# Altium PCB SEG_pressure gauge_up  V2.1.PcbDoc (part 5 of 5)
Units mm, origin at the board's own origin, x right, y up, seen from the top; angles counter-clockwise.
Board outline 67.74 x 67.74 mm, 2 copper layers (Top Layer, Bottom Layer); 36 components, 59 nets, 200 pads, 20 vias.
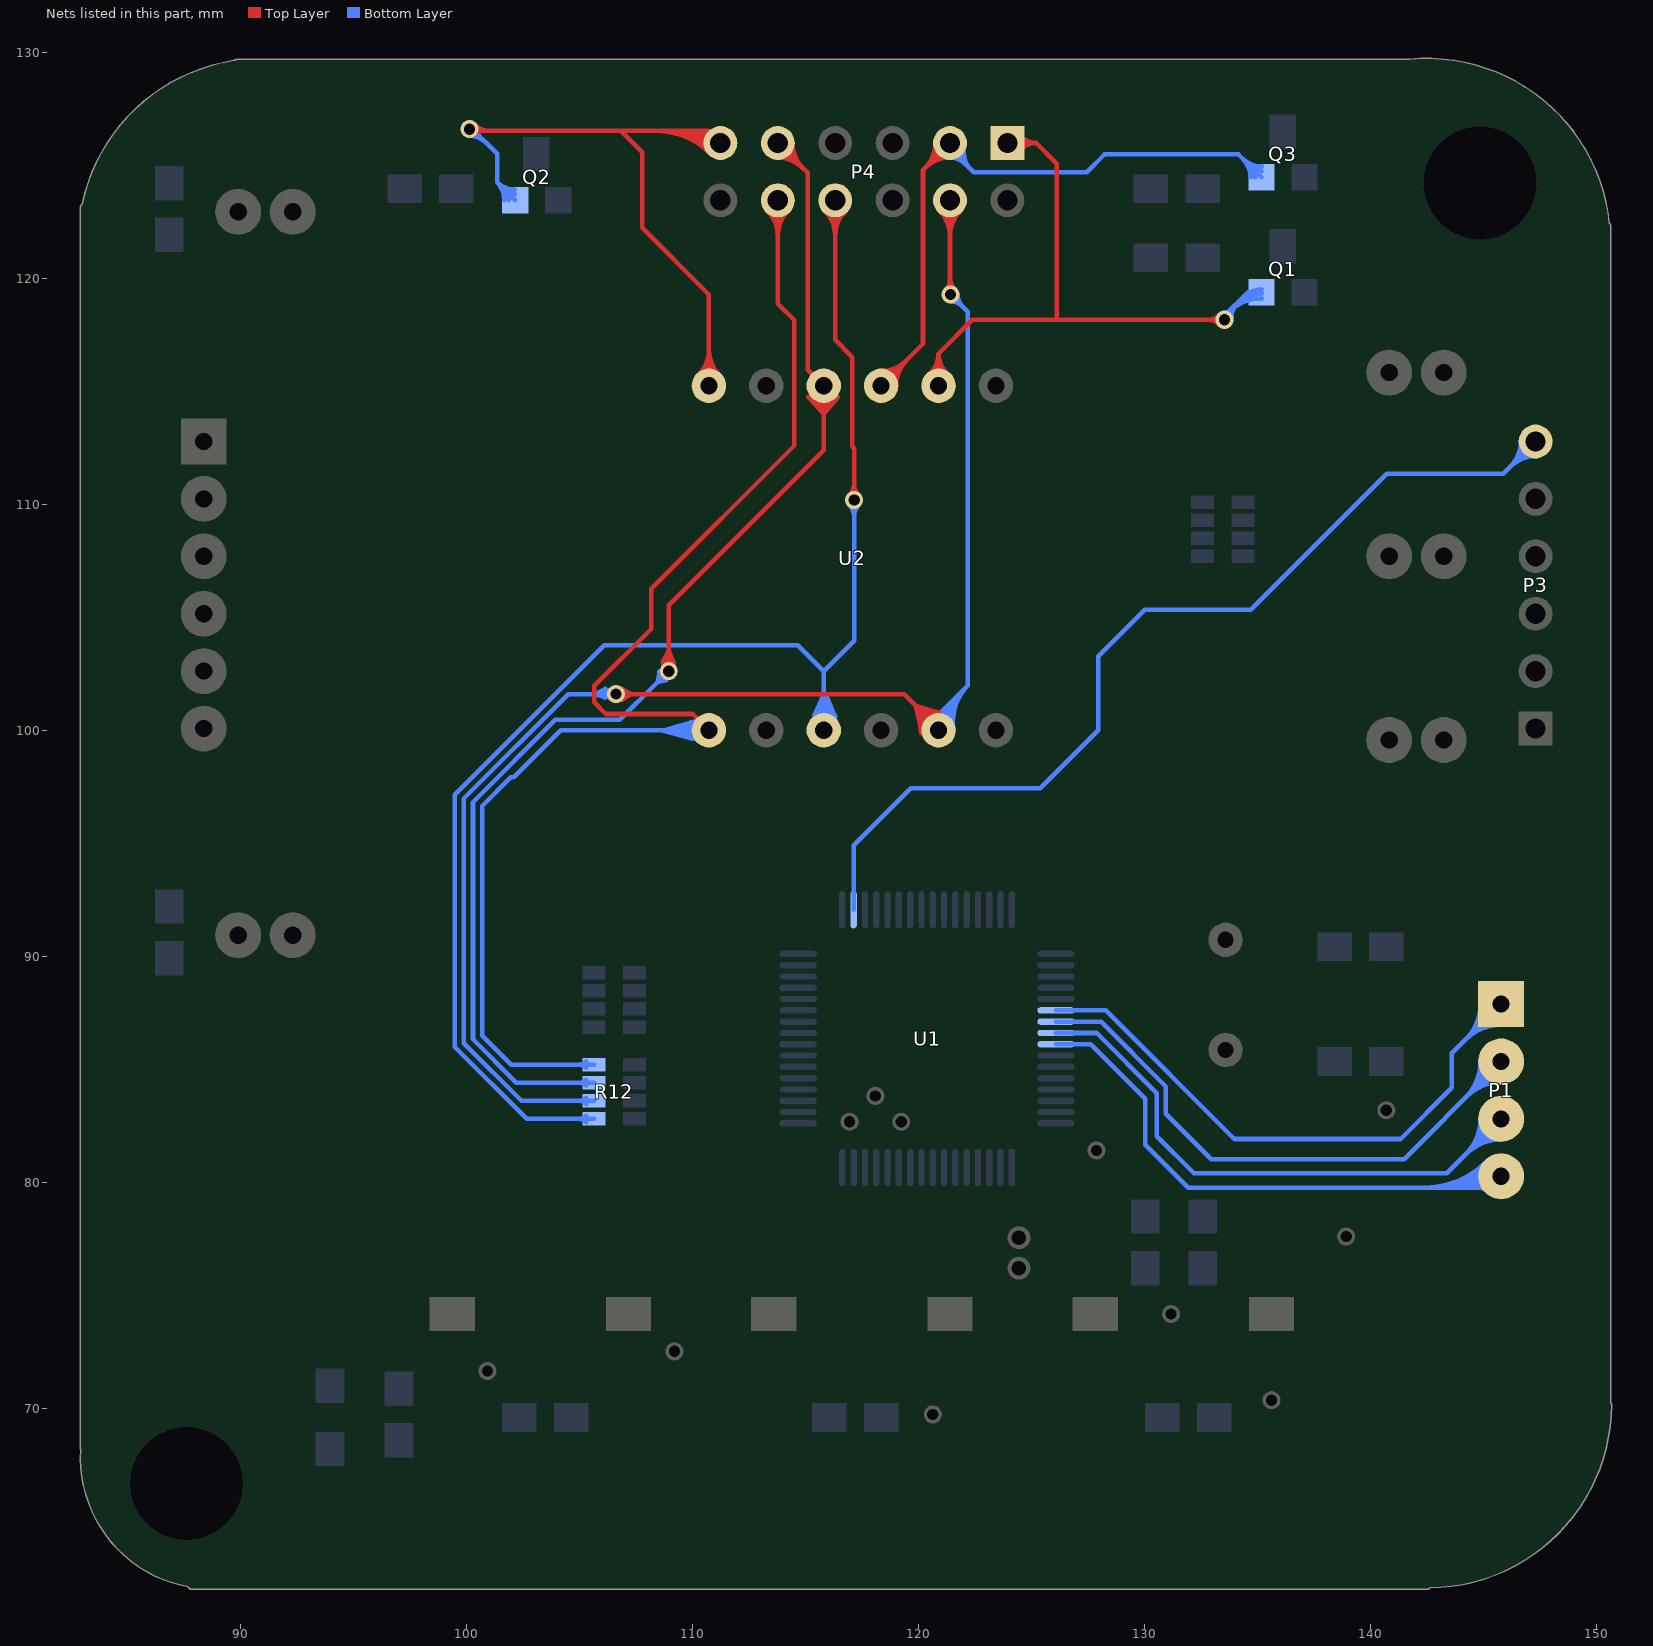
[diagram p5: the nets of this part, all layers, seen from the top]

## Via types
v1: diameter 0.8, hole 0.5, Top Layer to Bottom Layer, 20 vias

## Nets (pads, with @x,y where several pads share a name; then routed paths per layer and width w, separated by ;. In a path a pad name is that pad's centre, name@x,y a point inside that pad or via, vN(x,y) a via of type N, cw(c..) or ccw(c..) an arc to the next point about the centre after c; other vN are vias at no path point) (continued)
SEG5: P4.11 R12.7 U2.e | length 140.3
  Top Layer w0.203: U2.e@110.744,100 110.027,100.717 106.187,100.717 105.67,101.234 105.67,101.966 108.185,104.48 108.185,106.255 114.529,112.598 114.529,118.135 113.792,118.872 P4.11@113.792,123.444 ; 113.792,121.879 cw(c115.357,121.879) 114.25,122.986 ccw(c115.357,121.879) 113.792,121.879 ; 113.792,121.879 ccw(c112.227,121.879) 113.334,122.986 cw(c112.227,121.879) 113.792,121.879 ; 113.792,122.369 cw(c114.867,122.369) 114.107,123.129 ccw(c114.867,122.369) 113.792,122.369 ; 113.792,122.369 ccw(c112.717,122.369) 113.477,123.129 cw(c112.717,122.369) 113.792,122.369
  Bottom Layer w0.203: R12.7@105.316,85.064 ccw(c104.977,84.725) 104.977,85.204 ccw(c104.977,85.683) R12.7@105.316,85.344 ; R12.7@105.664,85.204 101.994,85.204 100.711,86.487 100.711,96.647 101.981,97.917 102.108,97.917 104.191,100 108.636,100 ; 110.058,99.644 110.058,99.619 110.007,99.619 108.636,100 ; 108.636,100 108.763,100 ; 108.636,100 109.982,99.797 108.763,100 ; 108.763,100 109.144,100 ; 108.763,100 110.058,100.381 U2.e@110.744,100 ; 108.936,100.051 cw(c109.361,98.604) U2.e@110.422,99.675 ; 108.936,100.051 cw(c109.361,98.604) U2.e@110.422,99.675 ; 108.936,100.051 cw(c109.361,98.604) U2.e@110.422,99.675 ; 108.936,100.051 cw(c109.361,98.604) U2.e@110.422,99.675 ; 108.936,100.051 cw(c109.361,98.604) U2.e@110.422,99.675 ; 109.144,100 U2.e@110.744,100 ; 109.144,100 109.957,100.279 109.88,100.152 110.007,100.254 U2.e@110.744,100 ; 109.15,100 cw(c109.15,98.406) U2.e@110.277,99.533 ; 109.15,100 ccw(c109.15,101.594) U2.e@110.277,100.467 ; 109.15,100 cw(c109.15,98.406) U2.e@110.277,99.533 ; 109.15,100 ccw(c109.15,101.594) U2.e@110.277,100.467 ; 109.15,100 cw(c109.15,98.406) U2.e@110.277,99.533 ; 109.15,100 ccw(c109.15,101.594) U2.e@110.277,100.467 ; 109.15,100 cw(c109.15,98.406) U2.e@110.277,99.533 ; 109.15,100 ccw(c109.15,101.594) U2.e@110.277,100.467 ; 109.15,100 ccw(c109.15,101.594) U2.e@110.277,100.467 ; 109.15,100 cw(c109.15,98.406) U2.e@110.277,99.533 ; 109.25,100.037 cw(c109.587,99.058) U2.e@110.389,99.711 ; 109.25,100.037 cw(c109.587,99.058) U2.e@110.389,99.711 ; 109.25,100.037 cw(c109.587,99.058) U2.e@110.389,99.711 ; 109.25,100.037 cw(c109.587,99.058) U2.e@110.389,99.711 ; 109.25,100.037 cw(c109.587,99.058) U2.e@110.389,99.711 ; 109.266,100.148 cw(c109.637,98.883) U2.e@110.565,99.82 ; 109.266,100.148 cw(c109.637,98.883) U2.e@110.565,99.82 ; 109.266,100.148 cw(c109.637,98.883) U2.e@110.565,99.82 ; 109.266,100.148 cw(c109.637,98.883) U2.e@110.565,99.82 ; 109.266,100.148 cw(c109.637,98.883) U2.e@110.565,99.82 ; 109.526,100.131 cw(c109.827,99.254) U2.e@110.547,99.84 ; 109.526,100.131 cw(c109.827,99.254) U2.e@110.547,99.84 ; 109.526,100.131 cw(c109.827,99.254) U2.e@110.547,99.84 ; 109.526,100.131 cw(c109.827,99.254) U2.e@110.547,99.84 ; 109.526,100.131 cw(c109.827,99.254) U2.e@110.547,99.84 ; 109.596,100.245 cw(c109.914,99.162) U2.e@110.708,99.964 ; 109.596,100.245 cw(c109.914,99.162) U2.e@110.708,99.964 ; 109.596,100.245 cw(c109.914,99.162) U2.e@110.708,99.964 ; 109.596,100.245 cw(c109.914,99.162) U2.e@110.708,99.964 ; 109.596,100.245 cw(c109.914,99.162) U2.e@110.708,99.964 ; 109.64,100 cw(c109.64,98.896) U2.e@110.421,99.677 ; 109.64,100 ccw(c109.64,101.104) U2.e@110.421,100.323 ; 109.64,100 cw(c109.64,98.896) U2.e@110.421,99.677 ; 109.64,100 ccw(c109.64,101.104) U2.e@110.421,100.323 ; 109.64,100 cw(c109.64,98.896) U2.e@110.421,99.677 ; 109.64,100 ccw(c109.64,101.104) U2.e@110.421,100.323 ; 109.64,100 cw(c109.64,98.896) U2.e@110.421,99.677 ; 109.64,100 ccw(c109.64,101.104) U2.e@110.421,100.323 ; 109.64,100 ccw(c109.64,101.104) U2.e@110.421,100.323 ; 109.64,100 cw(c109.64,98.896) U2.e@110.421,99.677 ; 109.801,100.226 cw(c110.068,99.45) U2.e@110.705,99.968 ; 109.801,100.226 cw(c110.068,99.45) U2.e@110.705,99.968 ; 109.801,100.226 cw(c110.068,99.45) U2.e@110.705,99.968 ; 109.801,100.226 cw(c110.068,99.45) U2.e@110.705,99.968 ; 109.801,100.226 cw(c110.068,99.45) U2.e@110.705,99.968 ; 109.926,100.342 cw(c110.191,99.442) U2.e@110.851,100.108 ; 109.926,100.342 cw(c110.191,99.442) U2.e@110.851,100.108 ; 109.926,100.342 cw(c110.191,99.442) U2.e@110.851,100.108 ; 109.926,100.342 cw(c110.191,99.442) U2.e@110.851,100.108 ; 109.926,100.342 cw(c110.191,99.442) U2.e@110.851,100.108
SEG6: P4.5 pad.14 R12.5 U2.f | length 93.4
  Top Layer w0.203: 109.195,102.946 108.966,103.505 ; P4.5@113.792,125.984 115.113,124.663 115.113,115.951 U2.f@115.824,115.24 ; 115.138,114.757 115.205,114.683 115.824,113.995 ; U2.f@115.418,114.63 115.65,114.268 ; 116.436,114.73 115.824,113.995 ; pad.14@108.755,102.827 ccw(c108.246,103.336) 108.966,103.336 ; pad.14@108.755,102.827 ccw(c108.246,103.336) 108.966,103.336 ; pad.14@108.755,102.827 ccw(c108.246,103.336) 108.966,103.336 ; pad.14@108.755,102.827 ccw(c108.246,103.336) 108.966,103.336 ; pad.14@108.755,102.827 ccw(c108.246,103.336) 108.966,103.336 ; 108.788,103.01 108.712,103.048 108.966,103.505 ; 108.788,103.01 108.814,102.997 108.966,103.099 ; 108.788,103.01 108.966,103.099 ; 108.788,103.01 108.773,103.002 108.712,102.972 pad.14@108.966,102.616 108.966,103.099 ; pad.14@108.898,102.683 ccw(c108.461,103.115) 109.03,103.348 ; pad.14@108.898,102.683 ccw(c108.461,103.115) 109.03,103.348 ; pad.14@108.898,102.683 ccw(c108.461,103.115) 109.03,103.348 ; pad.14@108.898,102.683 ccw(c108.461,103.115) 109.03,103.348 ; pad.14@108.898,102.683 ccw(c108.461,103.115) 109.03,103.348 ; 108.966,103.099 108.966,103.505 ; 108.966,103.336 ccw(c109.686,103.336) pad.14@109.177,102.827 ; 108.966,103.336 ccw(c109.686,103.336) pad.14@109.177,102.827 ; 108.966,103.336 ccw(c109.686,103.336) pad.14@109.177,102.827 ; 108.966,103.336 ccw(c109.686,103.336) pad.14@109.177,102.827 ; 108.966,103.336 ccw(c109.686,103.336) pad.14@109.177,102.827 ; 108.966,103.505 108.966,105.537 115.824,112.395 115.824,113.995 ; pad.14@109.043,102.54 ccw(c108.699,102.88) 109.147,103.063 ; pad.14@109.043,102.54 ccw(c108.699,102.88) 109.147,103.063 ; pad.14@109.043,102.54 ccw(c108.699,102.88) 109.147,103.063 ; pad.14@109.043,102.54 ccw(c108.699,102.88) 109.147,103.063 ; pad.14@109.043,102.54 ccw(c108.699,102.88) 109.147,103.063 ; P4.5@113.792,125.336 cw(c113.792,123.77) 114.899,124.877 ; P4.5@113.792,125.336 cw(c113.792,123.77) 114.899,124.877 ; P4.5@113.792,125.336 cw(c113.792,123.77) 114.899,124.877 ; P4.5@113.792,125.539 cw(c113.792,124.464) 114.552,125.224 ; P4.5@113.792,125.539 cw(c113.792,124.464) 114.552,125.224 ; P4.5@113.792,125.539 cw(c113.792,124.464) 114.552,125.224 ; P4.5@114.237,125.984 ccw(c115.312,125.984) 114.552,125.224 ; P4.5@114.237,125.984 ccw(c115.312,125.984) 114.552,125.224 ; P4.5@114.237,125.984 ccw(c115.312,125.984) 114.552,125.224 ; P4.5@114.44,125.984 ccw(c116.006,125.984) 114.899,124.877 ; P4.5@114.44,125.984 ccw(c116.006,125.984) 114.899,124.877 ; P4.5@114.44,125.984 ccw(c116.006,125.984) 114.899,124.877 ; U2.f@115.468,114.684 cw(c115.248,114.34) 115.65,114.268 ; U2.f@115.468,114.684 cw(c115.248,114.34) 115.65,114.268 ; U2.f@115.468,114.684 cw(c115.248,114.34) 115.65,114.268 ; U2.f@115.468,114.684 cw(c115.248,114.34) 115.65,114.268 ; U2.f@115.468,114.684 cw(c115.248,114.34) 115.65,114.268 ; 115.65,114.268 cw(c116.052,114.196) U2.f@115.965,114.595 ; 115.65,114.268 cw(c116.052,114.196) U2.f@115.965,114.595 ; 115.65,114.268 cw(c116.052,114.196) U2.f@115.965,114.595 ; 115.65,114.268 cw(c116.052,114.196) U2.f@115.965,114.595 ; 115.65,114.268 cw(c116.052,114.196) U2.f@115.965,114.595 ; 115.65,114.268 115.824,113.995 ; 115.65,114.268 115.646,114.249 115.824,113.995 ; 115.65,114.268 U2.f@115.824,115.24 ; 115.824,113.995 115.824,114.376 ; 115.824,113.995 116.18,114.554 116.17,114.549 115.824,114.376 ; 115.824,114.376 U2.f@115.824,115.24
  Bottom Layer w0.203: R12.5@105.316,84.264 ccw(c104.977,83.925) 104.977,84.404 ccw(c104.977,84.883) R12.5@105.316,84.544 ; R12.5@105.664,84.404 102.224,84.404 100.308,86.32 100.308,96.814 103.951,100.457 106.807,100.457 108.471,102.121 ; 108.56,102.616 108.471,102.121 ; 108.471,102.121 108.864,102.21 pad.14@108.966,102.616 108.471,102.121
SEG7: P4.8 pad.13 R12.3 U2.g | length 137.1
  Top Layer w0.203: pad.13@106.883,101.346 107.315,101.6 ; 120.548,100.762 120.447,100.718 ; 120.929,100.787 120.675,100.838 ; v1@121.412,119.253 121.412,119.278 P4.8@121.412,123.444 ; 107.315,101.6 pad.13@106.629,101.6 106.553,101.6 106.605,101.636 106.883,101.829 107.315,101.6 ; 107.315,101.6 119.38,101.6 119.888,101.092 ; 119.888,101.092 120.066,100.33 ; 119.888,101.092 120.574,100.838 120.371,100.838 120.447,100.718 ; 119.888,101.092 120.675,100.838 ; 119.888,101.092 120.319,100.661 ; 120.066,100.33 120.142,99.873 120.374,100.293 U2.g@120.486,100.494 ; 120.066,100.33 120.091,100.279 120.272,100.505 120.362,100.618 ; 120.286,100.647 120.142,100.584 119.99,100.762 120.286,100.647 ; 120.286,100.647 120.319,100.661 ; 120.286,100.647 120.362,100.618 ; 120.319,100.661 120.362,100.618 ; 120.319,100.661 120.447,100.718 ; 120.362,100.618 U2.g@120.486,100.494 ; 120.447,100.718 U2.g@120.534,100.582 ; U2.g@120.486,100.494 U2.g@120.534,100.582 ; U2.g@120.486,100.494 U2.g@120.771,100.209 ; U2.g@120.534,100.582 120.675,100.838 ; U2.g@120.534,100.582 U2.g@120.771,100.209 ; 120.675,100.838 U2.g@120.876,100.104 ; U2.g@120.771,100.209 U2.g@120.876,100.104 ; U2.g@120.771,100.209 U2.g@120.904,100 ; U2.g@120.876,100.104 120.904,100.076 U2.g@120.904,100 ; U2.g@120.876,100.104 U2.g@120.904,100 ; P4.8@120.954,122.986 cw(c119.847,121.879) 121.412,121.879 ; P4.8@120.954,122.986 cw(c119.847,121.879) 121.412,121.879 ; P4.8@120.954,122.986 cw(c119.847,121.879) 121.412,121.879 ; P4.8@121.097,123.129 cw(c120.337,122.369) 121.412,122.369 ; P4.8@121.097,123.129 cw(c120.337,122.369) 121.412,122.369 ; P4.8@121.097,123.129 cw(c120.337,122.369) 121.412,122.369 ; v1@121.226,119.489 ccw(c120.778,119.937) 121.412,119.937 ; v1@121.226,119.489 ccw(c120.778,119.937) 121.412,119.937 ; v1@121.226,119.489 ccw(c120.778,119.937) 121.412,119.937 ; 121.412,120.06 ccw(c122.219,120.06) v1@121.648,119.489 ; 121.412,120.06 ccw(c122.219,120.06) v1@121.648,119.489 ; 121.412,120.06 ccw(c122.219,120.06) v1@121.648,119.489 ; 121.412,121.879 cw(c122.977,121.879) P4.8@121.87,122.986 ; 121.412,121.879 cw(c122.977,121.879) P4.8@121.87,122.986 ; 121.412,121.879 cw(c122.977,121.879) P4.8@121.87,122.986 ; 121.412,122.369 cw(c122.487,122.369) P4.8@121.727,123.129 ; 121.412,122.369 cw(c122.487,122.369) P4.8@121.727,123.129 ; 121.412,122.369 cw(c122.487,122.369) P4.8@121.727,123.129
  Bottom Layer w0.203: R12.3@105.316,83.464 ccw(c104.977,83.125) 104.977,83.604 ccw(c104.977,84.083) R12.3@105.316,83.744 ; R12.3@105.664,83.604 102.454,83.604 99.905,86.153 99.905,96.981 104.524,101.6 105.715,101.6 ; 106.147,101.448 105.715,101.6 ; pad.13@106.418,101.389 ccw(c105.909,100.88) 105.909,101.6 ccw(c105.909,102.32) pad.13@106.418,101.811 ; pad.13@106.553,101.6 106.147,101.829 105.715,101.6 ; pad.13@106.617,101.409 106.528,101.498 106.426,101.6 105.715,101.6 ; U2.g@120.904,100 120.904,100.686 122.199,101.981 ; v1(121.437,119.278) 122.199,118.516 122.199,101.981 ; U2.g@120.753,99.98 cw(c121.743,100.112) 121.037,100.818 ; U2.g@120.753,99.98 cw(c121.743,100.112) 121.037,100.818 ; U2.g@120.753,99.98 cw(c121.743,100.112) 121.037,100.818 ; U2.g@120.753,99.98 cw(c121.743,100.112) 121.037,100.818 ; U2.g@120.753,99.98 cw(c121.743,100.112) 121.037,100.818 ; U2.g@120.954,100.007 cw(c122.256,100.181) 121.327,101.109 ; U2.g@120.954,100.007 cw(c122.256,100.181) 121.327,101.109 ; U2.g@120.954,100.007 cw(c122.256,100.181) 121.327,101.109 ; U2.g@120.954,100.007 cw(c122.256,100.181) 121.327,101.109 ; U2.g@120.954,100.007 cw(c122.256,100.181) 121.327,101.109 ; U2.g@121.156,100.034 cw(c122.769,100.249) 121.618,101.4 ; U2.g@121.156,100.034 cw(c122.769,100.249) 121.618,101.4 ; U2.g@121.156,100.034 cw(c122.769,100.249) 121.618,101.4 ; U2.g@121.156,100.034 cw(c122.769,100.249) 121.618,101.4 ; U2.g@121.156,100.034 cw(c122.769,100.249) 121.618,101.4 ; U2.g@121.357,100.061 cw(c123.281,100.318) 121.909,101.69 ; U2.g@121.357,100.061 cw(c123.281,100.318) 121.909,101.69 ; U2.g@121.357,100.061 cw(c123.281,100.318) 121.909,101.69 ; U2.g@121.357,100.061 cw(c123.281,100.318) 121.909,101.69 ; U2.g@121.357,100.061 cw(c123.281,100.318) 121.909,101.69 ; v1@121.437,118.98 cw(c121.437,118.26) 121.947,118.769 ; v1@121.437,118.98 cw(c121.437,118.26) 121.947,118.769 ; v1@121.437,118.98 cw(c121.437,118.26) 121.947,118.769 ; v1@121.437,118.98 cw(c121.437,118.26) 121.947,118.769 ; v1@121.437,118.98 cw(c121.437,118.26) 121.947,118.769 ; U2.g@121.559,100.087 cw(c123.794,100.386) 122.199,101.981 ; U2.g@121.559,100.087 cw(c123.794,100.386) 122.199,101.981 ; U2.g@121.559,100.087 cw(c123.794,100.386) 122.199,101.981 ; U2.g@121.559,100.087 cw(c123.794,100.386) 122.199,101.981 ; U2.g@121.559,100.087 cw(c123.794,100.386) 122.199,101.981 ; v1@121.736,119.278 ccw(c122.456,119.278) 121.947,118.769 ; v1@121.736,119.278 ccw(c122.456,119.278) 121.947,118.769 ; v1@121.736,119.278 ccw(c122.456,119.278) 121.947,118.769 ; v1@121.736,119.278 ccw(c122.456,119.278) 121.947,118.769 ; v1@121.736,119.278 ccw(c122.456,119.278) 121.947,118.769
SEG8: P4.10 R12.1 U2.dot | length 116.9
  Top Layer w0.203: P4.10@116.332,123.444 116.332,117.272 117.094,116.51 117.094,112.547 117.17,112.471 117.17,110.287 117.221,110.236 v1(117.17,110.185) ; P4.10@115.874,122.986 cw(c114.767,121.879) 116.332,121.879 ; P4.10@115.874,122.986 cw(c114.767,121.879) 116.332,121.879 ; P4.10@115.874,122.986 cw(c114.767,121.879) 116.332,121.879 ; P4.10@116.017,123.129 cw(c115.257,122.369) 116.332,122.369 ; P4.10@116.017,123.129 cw(c115.257,122.369) 116.332,122.369 ; P4.10@116.017,123.129 cw(c115.257,122.369) 116.332,122.369 ; 116.332,121.879 cw(c117.897,121.879) P4.10@116.79,122.986 ; 116.332,121.879 cw(c117.897,121.879) P4.10@116.79,122.986 ; 116.332,121.879 cw(c117.897,121.879) P4.10@116.79,122.986 ; 116.332,122.369 cw(c117.407,122.369) P4.10@116.647,123.129 ; 116.332,122.369 cw(c117.407,122.369) P4.10@116.647,123.129 ; 116.332,122.369 cw(c117.407,122.369) P4.10@116.647,123.129 ; v1@116.959,110.396 ccw(c116.45,110.906) 117.17,110.906 ; v1@116.959,110.396 ccw(c116.45,110.906) 117.17,110.906 ; v1@116.959,110.396 ccw(c116.45,110.906) 117.17,110.906 ; 117.17,110.906 ccw(c117.891,110.906) v1@117.381,110.396 ; 117.17,110.906 ccw(c117.891,110.906) v1@117.381,110.396 ; 117.17,110.906 ccw(c117.891,110.906) v1@117.381,110.396
  Bottom Layer w0.203: R12.1@105.316,82.664 ccw(c104.977,82.325) 104.977,82.804 ccw(c104.977,83.283) R12.1@105.316,82.944 ; R12.1@105.664,82.804 102.683,82.804 99.501,85.986 99.501,97.148 106.112,103.759 114.681,103.759 115.824,102.616 ; 115.57,100.813 115.418,100.66 115.824,101.549 ; U2.dot@115.824,100 115.824,101.244 ; v1(117.17,110.185) 117.17,103.962 115.824,102.616 ; U2.dot@115.454,100.547 ccw(c114.982,101.244) 115.824,101.244 ; U2.dot@115.454,100.547 ccw(c114.982,101.244) 115.824,101.244 ; U2.dot@115.454,100.547 ccw(c114.982,101.244) 115.824,101.244 ; U2.dot@115.454,100.547 ccw(c114.982,101.244) 115.824,101.244 ; U2.dot@115.454,100.547 ccw(c114.982,101.244) 115.824,101.244 ; U2.dot@115.568,100.379 ccw(c115.241,100.861) 115.824,100.861 ; U2.dot@115.568,100.379 ccw(c115.241,100.861) 115.824,100.861 ; U2.dot@115.568,100.379 ccw(c115.241,100.861) 115.824,100.861 ; U2.dot@115.568,100.379 ccw(c115.241,100.861) 115.824,100.861 ; U2.dot@115.568,100.379 ccw(c115.241,100.861) 115.824,100.861 ; U2.dot@115.58,100.386 ccw(c115.222,100.951) 115.838,101.211 ; U2.dot@115.58,100.386 ccw(c115.222,100.951) 115.838,101.211 ; U2.dot@115.58,100.386 ccw(c115.222,100.951) 115.838,101.211 ; U2.dot@115.58,100.386 ccw(c115.222,100.951) 115.838,101.211 ; U2.dot@115.58,100.386 ccw(c115.222,100.951) 115.838,101.211 ; U2.dot@115.688,100.215 ccw(c115.352,100.746) 115.931,100.989 ; U2.dot@115.688,100.215 ccw(c115.352,100.746) 115.931,100.989 ; U2.dot@115.688,100.215 ccw(c115.352,100.746) 115.931,100.989 ; U2.dot@115.688,100.215 ccw(c115.352,100.746) 115.931,100.989 ; U2.dot@115.688,100.215 ccw(c115.352,100.746) 115.931,100.989 ; U2.dot@115.797,100.043 ccw(c115.482,100.54) 116.024,100.768 ; U2.dot@115.797,100.043 ccw(c115.482,100.54) 116.024,100.768 ; U2.dot@115.797,100.043 ccw(c115.482,100.54) 116.024,100.768 ; U2.dot@115.797,100.043 ccw(c115.482,100.54) 116.024,100.768 ; U2.dot@115.797,100.043 ccw(c115.482,100.54) 116.024,100.768 ; 115.824,100.861 ccw(c116.407,100.861) U2.dot@116.08,100.379 ; 115.824,100.861 ccw(c116.407,100.861) U2.dot@116.08,100.379 ; 115.824,100.861 ccw(c116.407,100.861) U2.dot@116.08,100.379 ; 115.824,100.861 ccw(c116.407,100.861) U2.dot@116.08,100.379 ; 115.824,100.861 ccw(c116.407,100.861) U2.dot@116.08,100.379 ; 115.824,101.244 ccw(c116.666,101.244) U2.dot@116.194,100.547 ; 115.824,101.244 ccw(c116.666,101.244) U2.dot@116.194,100.547 ; 115.824,101.244 ccw(c116.666,101.244) U2.dot@116.194,100.547 ; 115.824,101.244 ccw(c116.666,101.244) U2.dot@116.194,100.547 ; 115.824,101.244 ccw(c116.666,101.244) U2.dot@116.194,100.547 ; 115.824,101.244 115.824,101.295 ; 115.824,101.244 115.697,100.762 115.824,101.371 ; 115.824,101.244 116.027,100.762 116.207,100.657 116.332,100.584 116.21,100.872 ; 115.824,101.295 115.824,101.371 ; 115.824,101.295 116.21,100.872 ; 115.824,101.371 115.824,101.549 ; 115.824,101.549 115.824,101.6 ; 115.824,101.6 115.824,102.616 ; 115.824,101.6 115.976,101.422 116.21,100.872 ; v1@116.959,109.974 cw(c116.45,109.465) 117.17,109.465 ; v1@116.959,109.974 cw(c116.45,109.465) 117.17,109.465 ; v1@116.959,109.974 cw(c116.45,109.465) 117.17,109.465 ; v1@116.959,109.974 cw(c116.45,109.465) 117.17,109.465 ; v1@116.959,109.974 cw(c116.45,109.465) 117.17,109.465 ; 117.17,109.465 cw(c117.891,109.465) v1@117.381,109.974 ; 117.17,109.465 cw(c117.891,109.465) v1@117.381,109.974 ; 117.17,109.465 cw(c117.891,109.465) v1@117.381,109.974 ; 117.17,109.465 cw(c117.891,109.465) v1@117.381,109.974 ; 117.17,109.465 cw(c117.891,109.465) v1@117.381,109.974
SEG9: P4.6 Q2.2 U2.1 | length 117.3
  Top Layer w0.203: v1(100.152,126.594) 100.228,126.517 106.851,126.517 ; U2.1@110.744,115.24 110.744,119.278 107.798,122.225 107.798,125.571 106.851,126.517 ; P4.6@111.252,125.984 110.719,126.517 106.851,126.517 ; v1@100.22,126.661 ccw(c100.566,127.007) 100.566,126.517 ; v1@100.22,126.661 ccw(c100.566,127.007) 100.566,126.517 ; v1@100.22,126.661 ccw(c100.566,127.007) 100.566,126.517 ; v1@100.22,126.661 ccw(c100.566,127.007) 100.566,126.517 ; v1@100.22,126.661 ccw(c100.566,127.007) 100.566,126.517 ; v1@100.363,126.383 cw(c100.689,126.057) 100.689,126.517 ; v1@100.363,126.383 cw(c100.689,126.057) 100.689,126.517 ; v1@100.363,126.383 cw(c100.689,126.057) 100.689,126.517 ; v1@100.363,126.383 cw(c100.689,126.057) 100.689,126.517 ; v1@100.363,126.383 cw(c100.689,126.057) 100.689,126.517 ; v1@100.363,126.805 ccw(c101.057,127.498) 101.057,126.517 ; v1@100.363,126.805 ccw(c101.057,127.498) 101.057,126.517 ; v1@100.363,126.805 ccw(c101.057,127.498) 101.057,126.517 ; v1@100.363,126.805 ccw(c101.057,127.498) 101.057,126.517 ; v1@100.363,126.805 ccw(c101.057,127.498) 101.057,126.517 ; 108.399,126.517 cw(c108.399,123.131) P4.6@110.794,125.526 ; 108.399,126.517 cw(c108.399,123.131) P4.6@110.794,125.526 ; 108.399,126.517 cw(c108.399,123.131) P4.6@110.794,125.526 ; 108.399,126.517 cw(c108.399,123.131) P4.6@110.794,125.526 ; 108.399,126.517 cw(c108.399,123.131) P4.6@110.794,125.526 ; 108.889,126.517 cw(c108.889,123.621) P4.6@110.937,125.669 ; 108.889,126.517 cw(c108.889,123.621) P4.6@110.937,125.669 ; 108.889,126.517 cw(c108.889,123.621) P4.6@110.937,125.669 ; 108.889,126.517 cw(c108.889,123.621) P4.6@110.937,125.669 ; 108.889,126.517 cw(c108.889,123.621) P4.6@110.937,125.669 ; 109.38,126.517 cw(c109.38,124.112) P4.6@111.081,125.813 ; 109.38,126.517 cw(c109.38,124.112) P4.6@111.081,125.813 ; 109.38,126.517 cw(c109.38,124.112) P4.6@111.081,125.813 ; 109.38,126.517 cw(c109.38,124.112) P4.6@111.081,125.813 ; 109.38,126.517 cw(c109.38,124.112) P4.6@111.081,125.813 ; 109.871,126.517 cw(c109.871,124.603) P4.6@111.225,125.957 ; 109.871,126.517 cw(c109.871,124.603) P4.6@111.225,125.957 ; 109.871,126.517 cw(c109.871,124.603) P4.6@111.225,125.957 ; 109.871,126.517 cw(c109.871,124.603) P4.6@111.225,125.957 ; 109.871,126.517 cw(c109.871,124.603) P4.6@111.225,125.957 ; U2.1@110.277,115.707 ccw(c109.15,116.834) 110.744,116.834 ; U2.1@110.277,115.707 ccw(c109.15,116.834) 110.744,116.834 ; U2.1@110.277,115.707 ccw(c109.15,116.834) 110.744,116.834 ; U2.1@110.277,115.707 ccw(c109.15,116.834) 110.744,116.834 ; U2.1@110.277,115.707 ccw(c109.15,116.834) 110.744,116.834 ; 110.361,126.517 cw(c110.361,125.093) P4.6@111.368,126.1 ; 110.361,126.517 cw(c110.361,125.093) P4.6@111.368,126.1 ; 110.361,126.517 cw(c110.361,125.093) P4.6@111.368,126.1 ; 110.361,126.517 cw(c110.361,125.093) P4.6@111.368,126.1 ; 110.361,126.517 cw(c110.361,125.093) P4.6@111.368,126.1 ; U2.1@110.421,115.563 ccw(c109.64,116.344) 110.744,116.344 ; U2.1@110.421,115.563 ccw(c109.64,116.344) 110.744,116.344 ; U2.1@110.421,115.563 ccw(c109.64,116.344) 110.744,116.344 ; U2.1@110.421,115.563 ccw(c109.64,116.344) 110.744,116.344 ; U2.1@110.421,115.563 ccw(c109.64,116.344) 110.744,116.344 ; 110.744,116.344 ccw(c111.848,116.344) U2.1@111.067,115.563 ; 110.744,116.344 ccw(c111.848,116.344) U2.1@111.067,115.563 ; 110.744,116.344 ccw(c111.848,116.344) U2.1@111.067,115.563 ; 110.744,116.344 ccw(c111.848,116.344) U2.1@111.067,115.563 ; 110.744,116.344 ccw(c111.848,116.344) U2.1@111.067,115.563 ; 110.744,116.834 ccw(c112.338,116.834) U2.1@111.211,115.707 ; 110.744,116.834 ccw(c112.338,116.834) U2.1@111.211,115.707 ; 110.744,116.834 ccw(c112.338,116.834) U2.1@111.211,115.707 ; 110.744,116.834 ccw(c112.338,116.834) U2.1@111.211,115.707 ; 110.744,116.834 ccw(c112.338,116.834) U2.1@111.211,115.707
  Bottom Layer w0.203: v1(100.152,126.594) 100.279,126.594 101.371,125.501 101.371,124.244 ; Q2.2@102.171,123.444 101.371,124.244 ; v1@100.152,126.295 cw(c100.152,125.268) 100.878,125.994 ; v1@100.152,126.295 cw(c100.152,125.268) 100.878,125.994 ; v1@100.152,126.295 cw(c100.152,125.268) 100.878,125.994 ; v1@100.152,126.498 cw(c100.152,125.962) 100.532,126.341 ; v1@100.152,126.498 cw(c100.152,125.962) 100.532,126.341 ; v1@100.152,126.498 cw(c100.152,125.962) 100.532,126.341 ; v1@100.451,126.594 ccw(c100.864,126.594) 100.572,126.301 ; v1@100.451,126.594 ccw(c100.864,126.594) 100.572,126.301 ; v1@100.451,126.594 ccw(c100.864,126.594) 100.572,126.301 ; 101.371,124.244 cw(c100.604,123.477) Q2.2@101.689,123.454 ; 101.371,124.244 ccw(c102.139,125.011) Q2.2@102.161,123.926 ; 101.371,124.244 cw(c100.604,123.477) Q2.2@101.689,123.454 ; 101.371,124.244 ccw(c102.139,125.011) Q2.2@102.161,123.926 ; 101.371,124.244 ccw(c102.139,125.011) Q2.2@102.161,123.926 ; 101.371,124.244 cw(c100.604,123.477) Q2.2@101.689,123.454 ; Q2.2@101.708,123.907 cw(c101.264,123.463) Q2.2@101.892,123.45 ; Q2.2@101.708,123.907 ccw(c102.152,124.351) Q2.2@102.166,123.723 ; Q2.2@101.708,123.907 cw(c101.264,123.463) Q2.2@101.892,123.45 ; Q2.2@101.708,123.907 ccw(c102.152,124.351) Q2.2@102.166,123.723 ; Q2.2@101.708,123.907 ccw(c102.152,124.351) Q2.2@102.166,123.723 ; Q2.2@101.708,123.907 cw(c101.264,123.463) Q2.2@101.892,123.45
SEG10: P4.2 Q3.2 U2.2 | length 83.7
  Top Layer w0.203: U2.2@118.364,115.24 120.218,117.094 120.218,124.79 P4.2@121.412,125.984 ; U2.2@118.364,115.697 ccw(c118.364,116.801) 119.144,116.02 ; U2.2@118.364,115.697 ccw(c118.364,116.801) 119.144,116.02 ; U2.2@118.364,115.697 ccw(c118.364,116.801) 119.144,116.02 ; U2.2@118.364,115.9 ccw(c118.364,117.495) 119.491,116.367 ; U2.2@118.364,115.9 ccw(c118.364,117.495) 119.491,116.367 ; U2.2@118.364,115.9 ccw(c118.364,117.495) 119.491,116.367 ; U2.2@118.821,115.24 cw(c119.925,115.24) 119.144,116.02 ; U2.2@118.821,115.24 cw(c119.925,115.24) 119.144,116.02 ; U2.2@118.821,115.24 cw(c119.925,115.24) 119.144,116.02 ; U2.2@119.024,115.24 cw(c120.619,115.24) 119.491,116.367 ; U2.2@119.024,115.24 cw(c120.619,115.24) 119.491,116.367 ; U2.2@119.024,115.24 cw(c120.619,115.24) 119.491,116.367 ; 120.305,124.877 cw(c121.412,123.77) P4.2@121.412,125.336 ; 120.305,124.877 ccw(c119.198,125.984) P4.2@120.764,125.984 ; 120.305,124.877 cw(c121.412,123.77) P4.2@121.412,125.336 ; 120.305,124.877 ccw(c119.198,125.984) P4.2@120.764,125.984 ; 120.305,124.877 ccw(c119.198,125.984) P4.2@120.764,125.984 ; 120.305,124.877 cw(c121.412,123.77) P4.2@121.412,125.336 ; 120.652,125.224 cw(c121.412,124.464) P4.2@121.412,125.539 ; 120.652,125.224 ccw(c119.892,125.984) P4.2@120.967,125.984 ; 120.652,125.224 cw(c121.412,124.464) P4.2@121.412,125.539 ; 120.652,125.224 ccw(c119.892,125.984) P4.2@120.967,125.984 ; 120.652,125.224 ccw(c119.892,125.984) P4.2@120.967,125.984 ; 120.652,125.224 cw(c121.412,124.464) P4.2@121.412,125.539
  Bottom Layer w0.203: P4.2@121.412,125.984 121.412,125.73 122.453,124.689 127.457,124.689 128.245,125.476 134.175,125.476 Q3.2@135.191,124.46 ; P4.2@121.412,125.336 cw(c121.412,124.383) 122.085,125.057 ; P4.2@121.412,125.336 cw(c121.412,124.383) 122.085,125.057 ; P4.2@121.412,125.336 cw(c121.412,124.383) 122.085,125.057 ; P4.2@121.412,125.336 cw(c121.412,124.383) 122.085,125.057 ; P4.2@121.412,125.336 cw(c121.412,124.383) 122.085,125.057 ; P4.2@121.647,125.927 ccw(c122.265,125.776) 121.815,125.327 ; P4.2@121.647,125.927 ccw(c122.265,125.776) 121.815,125.327 ; P4.2@121.647,125.927 ccw(c122.265,125.776) 121.815,125.327 ; P4.2@121.647,125.927 ccw(c122.265,125.776) 121.815,125.327 ; P4.2@121.647,125.927 ccw(c122.265,125.776) 121.815,125.327 ; P4.2@121.845,125.879 ccw(c122.676,125.676) 122.071,125.071 ; P4.2@121.845,125.879 ccw(c122.676,125.676) 122.071,125.071 ; P4.2@121.845,125.879 ccw(c122.676,125.676) 122.071,125.071 ; P4.2@121.845,125.879 ccw(c122.676,125.676) 122.071,125.071 ; P4.2@121.845,125.879 ccw(c122.676,125.676) 122.071,125.071 ; P4.2@122.042,125.831 ccw(c123.087,125.576) 122.326,124.816 ; P4.2@122.042,125.831 ccw(c123.087,125.576) 122.326,124.816 ; P4.2@122.042,125.831 ccw(c123.087,125.576) 122.326,124.816 ; P4.2@122.042,125.831 ccw(c123.087,125.576) 122.326,124.816 ; P4.2@122.042,125.831 ccw(c123.087,125.576) 122.326,124.816 ; 134.368,125.284 cw(c133.544,124.46) Q3.2@134.709,124.46 ; 134.368,125.284 ccw(c135.191,126.108) Q3.2@135.191,124.943 ; 134.368,125.284 cw(c133.544,124.46) Q3.2@134.709,124.46 ; 134.368,125.284 ccw(c135.191,126.108) Q3.2@135.191,124.943 ; 134.368,125.284 cw(c133.544,124.46) Q3.2@134.709,124.46 ; 134.368,125.284 ccw(c135.191,126.108) Q3.2@135.191,124.943 ; 134.368,125.284 cw(c133.544,124.46) Q3.2@134.709,124.46 ; 134.368,125.284 ccw(c135.191,126.108) Q3.2@135.191,124.943 ; 134.368,125.284 ccw(c135.191,126.108) Q3.2@135.191,124.943 ; 134.368,125.284 cw(c133.544,124.46) Q3.2@134.709,124.46 ; Q3.2@134.715,124.937 cw(c134.238,124.46) Q3.2@134.912,124.46 ; Q3.2@134.715,124.937 ccw(c135.191,125.414) Q3.2@135.191,124.739 ; Q3.2@134.715,124.937 cw(c134.238,124.46) Q3.2@134.912,124.46 ; Q3.2@134.715,124.937 ccw(c135.191,125.414) Q3.2@135.191,124.739 ; Q3.2@134.715,124.937 cw(c134.238,124.46) Q3.2@134.912,124.46 ; Q3.2@134.715,124.937 ccw(c135.191,125.414) Q3.2@135.191,124.739 ; Q3.2@134.715,124.937 cw(c134.238,124.46) Q3.2@134.912,124.46 ; Q3.2@134.715,124.937 ccw(c135.191,125.414) Q3.2@135.191,124.739 ; Q3.2@134.715,124.937 ccw(c135.191,125.414) Q3.2@135.191,124.739 ; Q3.2@134.715,124.937 cw(c134.238,124.46) Q3.2@134.912,124.46
SEG11: P4.1 Q1.2 U2.3 | length 76.5
  Top Layer w0.203: U2.3@120.904,115.24 120.904,116.662 ; P4.1@123.952,125.984 125.222,125.984 ; 126.136,118.186 126.136,125.07 125.222,125.984 ; v1(133.553,118.161) 122.403,118.161 120.904,116.662 ; U2.3@120.478,115.745 ccw(c119.703,116.662) 120.904,116.662 ; U2.3@120.478,115.745 ccw(c119.703,116.662) 120.904,116.662 ; U2.3@120.478,115.745 ccw(c119.703,116.662) 120.904,116.662 ; U2.3@120.609,115.589 ccw(c120.073,116.225) 120.904,116.225 ; U2.3@120.609,115.589 ccw(c120.073,116.225) 120.904,116.225 ; U2.3@120.609,115.589 ccw(c120.073,116.225) 120.904,116.225 ; 120.904,116.225 ccw(c121.735,116.225) U2.3@121.199,115.589 ; 120.904,116.225 ccw(c121.735,116.225) U2.3@121.199,115.589 ; 120.904,116.225 ccw(c121.735,116.225) U2.3@121.199,115.589 ; 120.904,116.662 ccw(c122.105,116.662) U2.3@121.33,115.745 ; 120.904,116.662 ccw(c122.105,116.662) U2.3@121.33,115.745 ; 120.904,116.662 ccw(c122.105,116.662) U2.3@121.33,115.745 ; P4.1@124.313,125.723 cw(c124.824,125.353) 124.824,125.984 ; P4.1@124.313,125.723 cw(c124.824,125.353) 124.824,125.984 ; P4.1@124.313,125.723 cw(c124.824,125.353) 124.824,125.984 ; P4.1@124.313,126.245 ccw(c124.824,126.615) 124.824,125.984 ; P4.1@124.313,126.245 ccw(c124.824,126.615) 124.824,125.984 ; P4.1@124.313,126.245 ccw(c124.824,126.615) 124.824,125.984 ; P4.1@124.477,125.604 cw(c125.222,125.065) 125.222,125.984 ; P4.1@124.477,125.604 cw(c125.222,125.065) 125.222,125.984 ; P4.1@124.477,125.604 cw(c125.222,125.065) 125.222,125.984 ; P4.1@124.477,126.364 ccw(c125.222,126.903) 125.222,125.984 ; P4.1@124.477,126.364 ccw(c125.222,126.903) 125.222,125.984 ; P4.1@124.477,126.364 ccw(c125.222,126.903) 125.222,125.984 ; 132.833,118.161 cw(c132.833,117.44) v1@133.342,117.95 ; 132.833,118.161 ccw(c132.833,118.881) v1@133.342,118.372 ; 132.833,118.161 cw(c132.833,117.44) v1@133.342,117.95 ; 132.833,118.161 ccw(c132.833,118.881) v1@133.342,118.372 ; 132.833,118.161 ccw(c132.833,118.881) v1@133.342,118.372 ; 132.833,118.161 cw(c132.833,117.44) v1@133.342,117.95
  Bottom Layer w0.203: v1@133.452,118.237 133.464,118.25 134.595,119.38 Q1.2@135.191,119.38 ; v1@133.553,118.459 ccw(c133.553,118.75) 133.759,118.544 ; v1@133.553,118.459 ccw(c133.553,118.75) 133.759,118.544 ; v1@133.553,118.459 ccw(c133.553,118.75) 133.759,118.544 ; v1@133.553,118.459 ccw(c133.553,118.75) 133.759,118.544 ; v1@133.553,118.459 ccw(c133.553,118.75) 133.759,118.544 ; v1@133.648,118.161 cw(c134.307,118.161) 133.841,118.627 ; v1@133.648,118.161 cw(c134.307,118.161) 133.841,118.627 ; v1@133.648,118.161 cw(c134.307,118.161) 133.841,118.627 ; v1@133.648,118.161 cw(c134.307,118.161) 133.841,118.627 ; v1@133.648,118.161 cw(c134.307,118.161) 133.841,118.627 ; v1@133.696,118.481 cw(c135.191,116.985) Q1.2@135.191,119.101 ; v1@133.696,118.481 cw(c135.191,116.985) Q1.2@135.191,119.101 ; v1@133.696,118.481 cw(c135.191,116.985) Q1.2@135.191,119.101 ; v1@133.696,118.481 cw(c135.191,116.985) Q1.2@135.191,119.101 ; v1@133.696,118.481 cw(c135.191,116.985) Q1.2@135.191,119.101 ; v1@133.852,118.161 cw(c135.001,118.161) 134.188,118.974 ; v1@133.852,118.161 cw(c135.001,118.161) 134.188,118.974 ; v1@133.852,118.161 cw(c135.001,118.161) 134.188,118.974 ; v1@133.852,118.161 cw(c135.001,118.161) 134.188,118.974 ; v1@133.852,118.161 cw(c135.001,118.161) 134.188,118.974 ; 134.042,118.828 cw(c135.191,117.679) Q1.2@135.191,119.304 ; 134.042,118.828 cw(c135.191,117.679) Q1.2@135.191,119.304 ; 134.042,118.828 cw(c135.191,117.679) Q1.2@135.191,119.304 ; 134.042,118.828 cw(c135.191,117.679) Q1.2@135.191,119.304 ; 134.042,118.828 cw(c135.191,117.679) Q1.2@135.191,119.304 ; 134.389,119.175 cw(c135.191,118.373) Q1.2@135.191,119.507 ; 134.389,119.175 cw(c135.191,118.373) Q1.2@135.191,119.507 ; 134.389,119.175 cw(c135.191,118.373) Q1.2@135.191,119.507 ; 134.389,119.175 cw(c135.191,118.373) Q1.2@135.191,119.507 ; 134.389,119.175 cw(c135.191,118.373) Q1.2@135.191,119.507
TCK: P1.4 U1.57 | length 36.2
  Bottom Layer w0.203: U1.57@126.099,86.106 127.635,86.106 130.048,83.693 130.048,81.661 131.953,79.756 P1.4@145.288,79.756 ; 142.362,79.756 ccw(c142.362,83.698) P1.4@145.149,80.911 ; 142.853,79.756 ccw(c142.853,83.207) P1.4@145.293,80.767 ; 143.343,79.756 ccw(c143.343,82.717) P1.4@145.437,80.623 ; 143.834,79.756 ccw(c143.834,82.226) P1.4@145.58,80.48 ; 144.324,79.756 ccw(c144.324,81.736) P1.4@145.724,80.336 ; P1.4@145.149,79.617 ccw(c144.815,79.283) 144.815,79.756 ccw(c144.815,81.245) P1.4@145.868,80.192
TDI: P1.2 U1.55 | length 65.2
  Bottom Layer w0.203: U1.55@126.099,87.106 128.095,87.106 130.962,84.238 130.962,83.033 132.969,81.026 141.503,81.026 145.161,84.684 145.161,84.709 P1.2@145.796,85.344 ; 144.217,83.74 ccw(c142.613,85.344) P1.2@144.882,85.344 ; 144.217,83.74 ccw(c142.613,85.344) P1.2@144.882,85.344 ; 144.217,83.74 ccw(c142.613,85.344) P1.2@144.882,85.344 ; 144.217,83.74 ccw(c142.613,85.344) P1.2@144.882,85.344 ; 144.217,83.74 ccw(c142.613,85.344) P1.2@144.882,85.344 ; 144.278,83.801 cw(c145.796,82.283) P1.2@145.796,84.43 ; 144.278,83.801 cw(c145.796,82.283) P1.2@145.796,84.43 ; 144.278,83.801 cw(c145.796,82.283) P1.2@145.796,84.43 ; 144.278,83.801 cw(c145.796,82.283) P1.2@145.796,84.43 ; 144.278,83.801 cw(c145.796,82.283) P1.2@145.796,84.43 ; 144.564,84.087 ccw(c143.306,85.344) P1.2@145.085,85.344 ; 144.564,84.087 ccw(c143.306,85.344) P1.2@145.085,85.344 ; 144.564,84.087 ccw(c143.306,85.344) P1.2@145.085,85.344 ; 144.564,84.087 ccw(c143.306,85.344) P1.2@145.085,85.344 ; 144.564,84.087 ccw(c143.306,85.344) P1.2@145.085,85.344 ; 144.625,84.148 cw(c145.796,82.977) P1.2@145.796,84.633 ; 144.625,84.148 cw(c145.796,82.977) P1.2@145.796,84.633 ; 144.625,84.148 cw(c145.796,82.977) P1.2@145.796,84.633 ; 144.625,84.148 cw(c145.796,82.977) P1.2@145.796,84.633 ; 144.625,84.148 cw(c145.796,82.977) P1.2@145.796,84.633 ; 144.911,84.433 ccw(c144,85.344) P1.2@145.288,85.344 ; 144.911,84.433 ccw(c144,85.344) P1.2@145.288,85.344 ; 144.911,84.433 ccw(c144,85.344) P1.2@145.288,85.344 ; 144.911,84.433 ccw(c144,85.344) P1.2@145.288,85.344 ; 144.911,84.433 ccw(c144,85.344) P1.2@145.288,85.344 ; 144.972,84.495 cw(c145.796,83.671) P1.2@145.796,84.836 ; 144.972,84.495 cw(c145.796,83.671) P1.2@145.796,84.836 ; 144.972,84.495 cw(c145.796,83.671) P1.2@145.796,84.836 ; 144.972,84.495 cw(c145.796,83.671) P1.2@145.796,84.836 ; 144.972,84.495 cw(c145.796,83.671) P1.2@145.796,84.836
TDO: P1.1 U1.54 | length 65.9
  Bottom Layer w0.203: U1.54@126.099,87.606 128.294,87.606 133.985,81.915 141.351,81.915 143.612,84.176 143.612,85.725 143.637,85.725 P1.1@145.796,87.884 ; 144.235,86.323 cw(c145.796,84.762) P1.1@145.796,86.97 ; 144.235,86.323 ccw(c142.674,87.884) P1.1@144.882,87.884 ; 144.235,86.323 cw(c145.796,84.762) P1.1@145.796,86.97 ; 144.235,86.323 ccw(c142.674,87.884) P1.1@144.882,87.884 ; 144.235,86.323 cw(c145.796,84.762) P1.1@145.796,86.97 ; 144.235,86.323 ccw(c142.674,87.884) P1.1@144.882,87.884 ; 144.235,86.323 cw(c145.796,84.762) P1.1@145.796,86.97 ; 144.235,86.323 ccw(c142.674,87.884) P1.1@144.882,87.884 ; 144.235,86.323 ccw(c142.674,87.884) P1.1@144.882,87.884 ; 144.235,86.323 cw(c145.796,84.762) P1.1@145.796,86.97 ; 144.582,86.67 cw(c145.796,85.456) P1.1@145.796,87.173 ; 144.582,86.67 ccw(c143.368,87.884) P1.1@145.085,87.884 ; 144.582,86.67 cw(c145.796,85.456) P1.1@145.796,87.173 ; 144.582,86.67 ccw(c143.368,87.884) P1.1@145.085,87.884 ; 144.582,86.67 cw(c145.796,85.456) P1.1@145.796,87.173 ; 144.582,86.67 ccw(c143.368,87.884) P1.1@145.085,87.884 ; 144.582,86.67 cw(c145.796,85.456) P1.1@145.796,87.173 ; 144.582,86.67 ccw(c143.368,87.884) P1.1@145.085,87.884 ; 144.582,86.67 ccw(c143.368,87.884) P1.1@145.085,87.884 ; 144.582,86.67 cw(c145.796,85.456) P1.1@145.796,87.173 ; P1.1@144.929,87.017 cw(c145.796,86.15) P1.1@145.796,87.376 ; P1.1@144.929,87.017 ccw(c144.062,87.884) P1.1@145.288,87.884 ; P1.1@144.929,87.017 cw(c145.796,86.15) P1.1@145.796,87.376 ; P1.1@144.929,87.017 ccw(c144.062,87.884) P1.1@145.288,87.884 ; P1.1@144.929,87.017 cw(c145.796,86.15) P1.1@145.796,87.376 ; P1.1@144.929,87.017 ccw(c144.062,87.884) P1.1@145.288,87.884 ; P1.1@144.929,87.017 cw(c145.796,86.15) P1.1@145.796,87.376 ; P1.1@144.929,87.017 ccw(c144.062,87.884) P1.1@145.288,87.884 ; P1.1@144.929,87.017 ccw(c144.062,87.884) P1.1@145.288,87.884 ; P1.1@144.929,87.017 cw(c145.796,86.15) P1.1@145.796,87.376
TMS: P1.3 U1.56 | length 65
  Bottom Layer w0.203: U1.56@126.099,86.606 127.897,86.606 130.556,83.947 130.556,82.042 132.207,80.391 143.383,80.391 P1.3@145.796,82.804 P1.3@145.923,82.931 ; 144.235,81.243 cw(c145.796,79.682) P1.3@145.796,81.89 ; 144.235,81.243 ccw(c142.674,82.804) P1.3@144.882,82.804 ; 144.235,81.243 cw(c145.796,79.682) P1.3@145.796,81.89 ; 144.235,81.243 ccw(c142.674,82.804) P1.3@144.882,82.804 ; 144.235,81.243 cw(c145.796,79.682) P1.3@145.796,81.89 ; 144.235,81.243 ccw(c142.674,82.804) P1.3@144.882,82.804 ; 144.235,81.243 cw(c145.796,79.682) P1.3@145.796,81.89 ; 144.235,81.243 ccw(c142.674,82.804) P1.3@144.882,82.804 ; 144.235,81.243 ccw(c142.674,82.804) P1.3@144.882,82.804 ; 144.235,81.243 cw(c145.796,79.682) P1.3@145.796,81.89 ; 144.582,81.59 cw(c145.796,80.376) P1.3@145.796,82.093 ; 144.582,81.59 ccw(c143.368,82.804) P1.3@145.085,82.804 ; 144.582,81.59 cw(c145.796,80.376) P1.3@145.796,82.093 ; 144.582,81.59 ccw(c143.368,82.804) P1.3@145.085,82.804 ; 144.582,81.59 cw(c145.796,80.376) P1.3@145.796,82.093 ; 144.582,81.59 ccw(c143.368,82.804) P1.3@145.085,82.804 ; 144.582,81.59 cw(c145.796,80.376) P1.3@145.796,82.093 ; 144.582,81.59 ccw(c143.368,82.804) P1.3@145.085,82.804 ; 144.582,81.59 ccw(c143.368,82.804) P1.3@145.085,82.804 ; 144.582,81.59 cw(c145.796,80.376) P1.3@145.796,82.093 ; 144.929,81.937 cw(c145.796,81.07) P1.3@145.796,82.296 ; 144.929,81.937 ccw(c144.062,82.804) P1.3@145.288,82.804 ; 144.929,81.937 cw(c145.796,81.07) P1.3@145.796,82.296 ; 144.929,81.937 ccw(c144.062,82.804) P1.3@145.288,82.804 ; 144.929,81.937 cw(c145.796,81.07) P1.3@145.796,82.296 ; 144.929,81.937 ccw(c144.062,82.804) P1.3@145.288,82.804 ; 144.929,81.937 cw(c145.796,81.07) P1.3@145.796,82.296 ; 144.929,81.937 ccw(c144.062,82.804) P1.3@145.288,82.804 ; 144.929,81.937 ccw(c144.062,82.804) P1.3@145.288,82.804 ; 144.929,81.937 cw(c145.796,81.07) P1.3@145.796,82.296
TX: P3.6 U1.34 | length 63.8
  Bottom Layer w0.203: U1.34@117.149,92.056 117.149,94.908 119.676,97.434 125.405,97.434 127.965,99.994 127.965,103.267 130.032,105.334 134.722,105.334 140.741,111.354 145.898,111.354 P3.6@147.32,112.776 P3.6@146.634,112.776 ; 146.213,111.669 cw(c147.32,110.562) P3.6@147.32,112.128 ; 146.213,111.669 ccw(c145.106,112.776) P3.6@146.672,112.776 ; 146.213,111.669 cw(c147.32,110.562) P3.6@147.32,112.128 ; 146.213,111.669 ccw(c145.106,112.776) P3.6@146.672,112.776 ; 146.213,111.669 cw(c147.32,110.562) P3.6@147.32,112.128 ; 146.213,111.669 ccw(c145.106,112.776) P3.6@146.672,112.776 ; 146.213,111.669 cw(c147.32,110.562) P3.6@147.32,112.128 ; 146.213,111.669 ccw(c145.106,112.776) P3.6@146.672,112.776 ; 146.213,111.669 ccw(c145.106,112.776) P3.6@146.672,112.776 ; 146.213,111.669 cw(c147.32,110.562) P3.6@147.32,112.128 ; 146.56,112.016 cw(c147.32,111.256) P3.6@147.32,112.331 ; 146.56,112.016 ccw(c145.8,112.776) P3.6@146.875,112.776 ; 146.56,112.016 cw(c147.32,111.256) P3.6@147.32,112.331 ; 146.56,112.016 ccw(c145.8,112.776) P3.6@146.875,112.776 ; 146.56,112.016 cw(c147.32,111.256) P3.6@147.32,112.331 ; 146.56,112.016 ccw(c145.8,112.776) P3.6@146.875,112.776 ; 146.56,112.016 cw(c147.32,111.256) P3.6@147.32,112.331 ; 146.56,112.016 ccw(c145.8,112.776) P3.6@146.875,112.776 ; 146.56,112.016 ccw(c145.8,112.776) P3.6@146.875,112.776 ; 146.56,112.016 cw(c147.32,111.256) P3.6@147.32,112.331
pads on no net: P4.3 R5.2 U1.7 U1.10 U1.11 U1.16 U1.28 U1.29 U1.30 U1.31 U1.32 U1.33 U1.36 U1.37 U1.38 U1.39 U1.40 U1.45 U1.47 U2.6

## Polygon pours and split planes (outlines as drawn)
GND on Top Layer "Top Layer-No Net" (solid, remove dead copper, pour order 1000): 57.683,140.894 75.768,54.432 142.85,45.415 164.795,58.75 160.934,143.485
GND on Bottom Layer "Bottom Layer-No Net" (solid, remove dead copper, pour order 1000): 57.683,150.927 65.786,142.824 65.786,51.181 164.694,51.181 172.364,43.51 169.799,46.076 169.799,148.793

## Keep-outs
Keep-Out Layer:
  lines w0.254: 83.083,68.25 ccw(c88.735,67.805) 88.29,62.154 ; 83.088,122.987 cw(c90.968,121.604) 89.736,129.508 ; 141.752,129.563 cw(c142.505,121.599) 150.47,122.352 ; 141.985,62.182 ccw(c142.022,70.717) 150.556,70.679
  lines w0.3: 83.088,68.224 83.088,123.139 ; 87.859,62.133 142.022,62.133 ; 89.865,129.533 142.011,129.533 ; 150.488,69.647 150.488,122.326

## Other copper
Top Layer:
  text "Gauge_TV2.1" at 88.621,78.791 h1.52

## Silkscreen, mask and mechanical layers (free items; w line width, h text height)
Top Overlay:
  text "+" at 88.316,122.479 h1.52 r90
  text "+" at 146.253,116.865 h1.52 r90
  text "+" at 145.72,109.271 h1.52 r90
  text "+" at 145.847,100.838 h1.52 r90
  text "+" at 88.265,90.551 h1.52 r90
Drill Drawing:
  text ".LEGEND" at 16.025,151.511 h1.52
  text "Drill Drawing." at 16.025,148.971 h1.52

## Text inside footprints (layer, text, board x,y; h text height)
P4: Top Overlay "7" at 126.492,123.952 h1.27 r180; Top Overlay "1" at 126.492,126.492 h1.27 r180; Top Overlay "6" at 109.22,126.492 h1.27 r180; Top Overlay "12" at 109.22,123.952 h1.27 r180